# Altium PCB ACDC_Flyback.PcbDoc
Units mm, origin at the board's own origin, x right, y up, seen from the top; angles counter-clockwise.
Board outline 96.5 x 38.4 mm, 2 copper layers (Top Layer, Bottom Layer); 39 components, 20 nets, 86 pads, 0 vias.
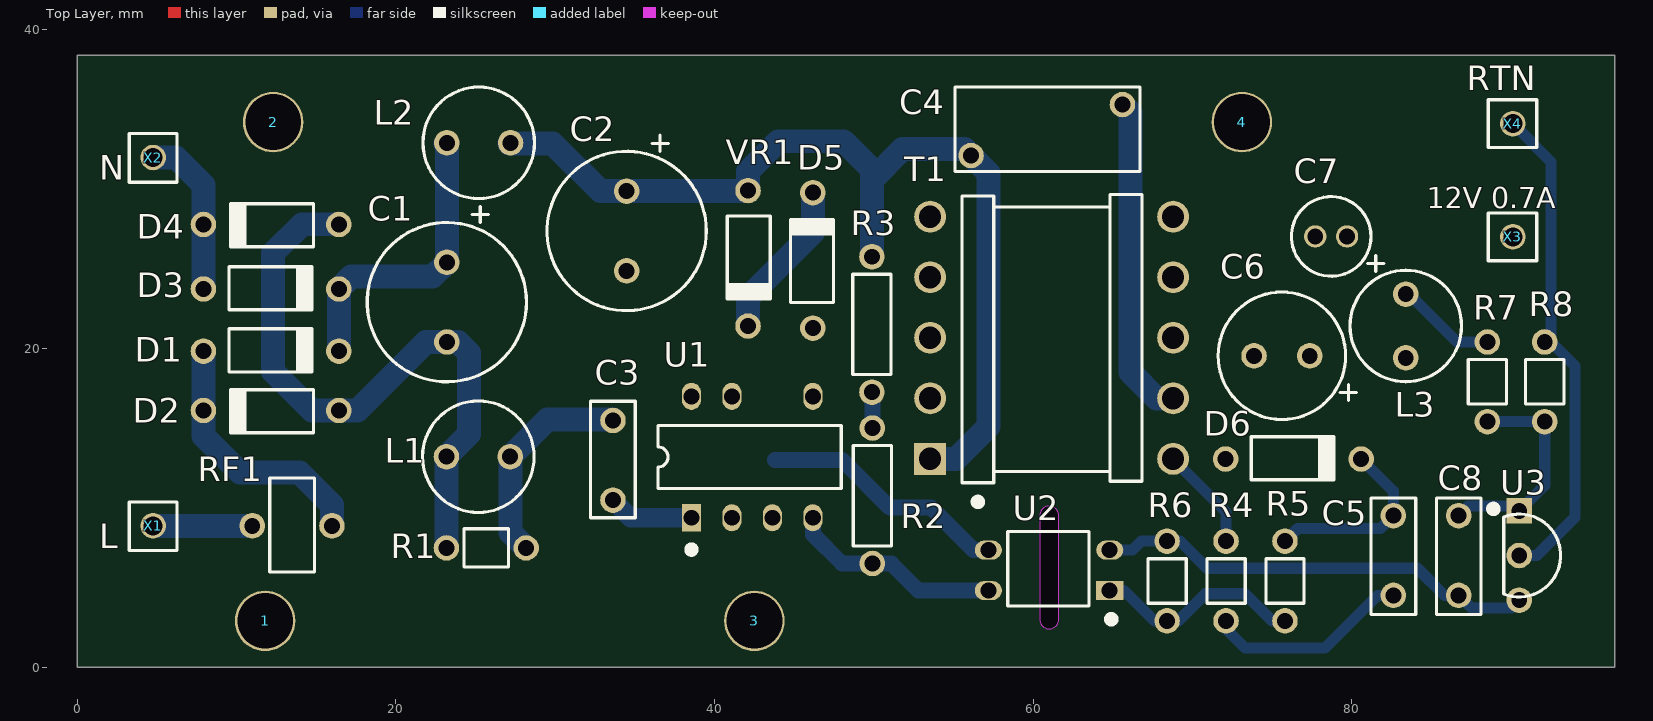
[diagram p0: Top Layer view]
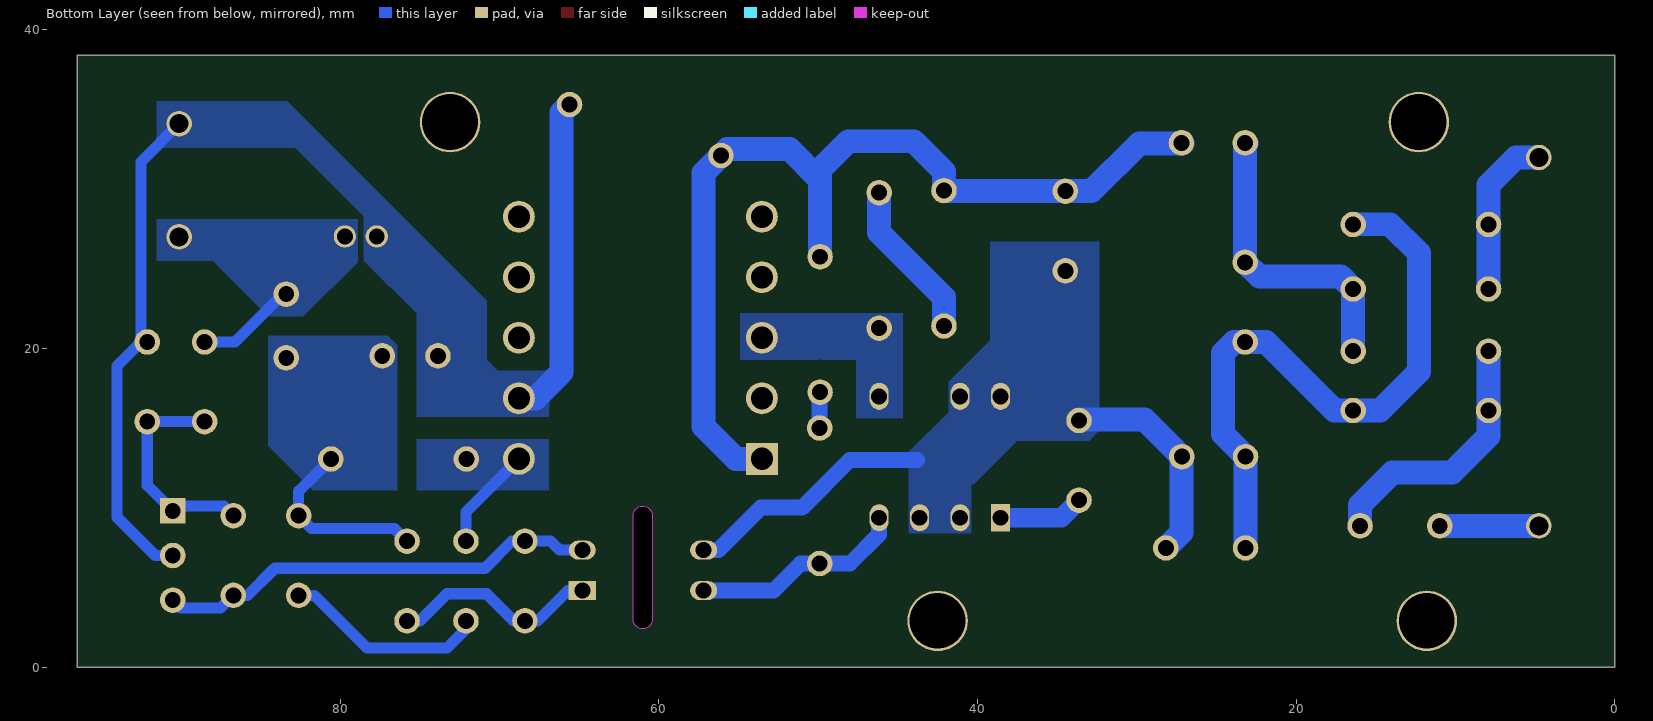
[diagram p1: Bottom Layer view, seen from below]

## Layer stack, top to bottom
Top Solder: solder mask 0.0102, Solder Resist, Dk 3.5
Top Layer: signal copper 0.0356
Dielectric 1: dielectric 0.32, FR-4, Dk 4.8
Bottom Layer: signal copper 0.0356
Bottom Solder: solder mask 0.0102, Solder Resist, Dk 3.5

## Board outline
0,0 0,38.4 96.5,38.4 96.5,0
cut-out: 60.4,3 ccw(c61,3) 61.6,3 61.6,9.5 ccw(c61,9.5) 60.4,9.5

## Design rules (kind name [scope] priority, off if disabled: settings)
Clearance Clearance_LV [WithinRoom('LV')] p1: gap=0.25 ignorepadtopadclearanceinfootprint=FALSE
Clearance Clearance_HV [WithinRoom('HV')] p2: gap=1.25 ignorepadtopadclearanceinfootprint=FALSE
Clearance [All] p3: gap=0.254 ignorepadtopadclearanceinfootprint=FALSE except(0: Arc-Hole Track-Hole SMDPad-Hole THPad-Hole Via-Hole Fill-Hole Poly-Hole Region-Hole Text-Hole)
PolygonConnect PolygonConnect_HV [All] p1: thpad.connectstyle=Direct thpad.reliefconductorwidth=0.254 thpad.reliefentries=4 thpad.polygonreliefangle="90 Angle" thpad.airgapwidth=0.254 smdpad.connectstyle=Relief smdpad.reliefconductorwidth=0.254 smdpad.reliefentries=4 smdpad.polygonreliefangle="90 Angle" smdpad.airgapwidth=0.254 via.connectstyle=Relief via.reliefconductorwidth=0.254 via.reliefentries=4 via.polygonreliefangle="90 Angle" via.airgapwidth=0.254
PolygonConnect [All] p2: connectstyle=Relief reliefconductorwidth=0.254 reliefentries=4 polygonreliefangle="90 Angle" airgapwidth=0.254
RoomDefinition LV [InComponentClass('New Class')] p1: confinementstyle=ConfineIn formatcopy=TRUE lockcomponents=FALSE outline 65.7,38.5 96.5,38.5 96.5,0 65.7,0
RoomDefinition HV [InComponentClass('Components Class 1')] p2: confinementstyle=ConfineIn formatcopy=TRUE lockcomponents=FALSE outline 0.068,38.454 60.012,38.454 60.012,0 0.068,0
RoutingVias [All] p1: holewidth=0.711 width=1.27 viastyle="Through Hole" minholewidth=0.711 minwidth=1.27 maxholewidth=0.711 maxwidth=1.27
SolderMaskExpansion [All] p1: expansion=0.102
Width Width_LV [WithinRoom('LV')] p1: maxlimit=1.5 minlimit=0.3 preferedwidth=0.5
Width Width_HV [WithinRoom('HV')] p2: maxlimit=1.5 minlimit=1 preferedwidth=1.2
Width [All] p3: maxlimit=1.5 minlimit=0.3 preferedwidth=0.3
30 further rules are at their usual default settings.

## Classes and differential pairs
component class "New Class": C5 C6 C7 C8 D6 L3 R4 R5 R6 R7 R8 U3 X3 X4
component class "Components Class 1": C1 C2 C3 D1 D2 D3 D4 D5 L1 L2 R1 R2 R3 RF1 U1 VR1 X1 X2

## Components (designator, comment, footprint, x,y, rotation, side; value= is the part's Value field where it differs from the comment)
1 "MNT HOLE 3.5mm" "MNT HOLE 3.5MM" 11.8,2.9 r90 top
2 "MNT HOLE 3.5mm" "MNT HOLE 3.5MM" 12.3,34.2 r90 top
3 "MNT HOLE 3.5mm" "MNT HOLE 3.5MM" 42.5,2.9 r90 top
4 "MNT HOLE 3.5mm" "MNT HOLE 3.5MM" 73.1,34.2 r90 top
C1 "10uF 400V" "CAP 10X20" 23.2,20.4 r90 top
C2 "10uF 400V" "CAP 10X20" 34.485,24.865 r90 top
C3 "0.1uF" "CAP CER 5MM" 33.625,15.475 r270 top
C4 "2n2" "CAP X1/Y1 9.5MM" 56.1,32.1 r0 top
C5 "27pF" "CAP CER 5MM" 82.6,4.5 r90 top
C6 "330uF 25V" "CAP 8X16" 73.855,19.531 r0 top
C7 "100uF 16V" "CAP 5X11" 77.697,27.024 r0 top
C8 "0.1uF" "CAP CER 5MM" 86.7,4.5 r90 top
D1 "1N4006" "DIODE H 8.5MM" 7.925,19.825 r0 top
D2 "1N4006" "DIODE H 8.5MM" 16.425,16.1 r180 top
D3 "1N4006" "DIODE H 8.5MM" 7.925,23.725 r0 top
D4 "1N4006" "DIODE H 8.5MM" 16.425,27.775 r180 top
D5 "1N4937" "DIODE H 8.5MM" 46.169,21.27 r90 top
D6 "1N4935" "DIODE H 8.5MM" 72.077,13.054 r0 top
L1 "1MH" "IND 4MM BLUE" 23.175,13.2 r0 top
L2 "1MH" "IND 4MM BLUE" 23.2,32.9 r0 top
L3 "3u3" "IND 4MM BLACK" 83.38,19.404 r90 top
R1 "4k7" "RES V 0.25W 5MM" 23.175,7.475 r0 top
R2 "1M" "RES H 0.25W 8.5MM" 49.9,6.5 r90 top
R3 "1M" "RES H 0.25W 8.5MM" 49.875,17.25 r90 top
R4 "360R" "RES V 0.25W 5MM" 72.1,7.9 r270 top
R5 "210R" "RES V 0.25W 5MM" 75.8,7.9 r270 top
R6 "1k" "RES V 0.25W 5MM" 68.4,7.9 r270 top
R7 "43k2" "RES V 0.25W 5MM" 88.5,15.4 r90 top
R8 "11k3" "RES V 0.25W 5MM" 92.1,20.4 r270 top
RF1 "10R" "RES V 2W 5MM" 10.99,8.863 r0 top
T1 "PH0262NL" PH0262NL 53.525,13.064 r90 top
U1 "TNY268PN" DIP8 38.549,9.371 r90 top
U2 "LTV-817" LTV-8X7 64.8,4.8 r180 top
U3 "TL431" "TO-92 (TO-226)" 90.5,9.8 r0 top
VR1 "P6KE2" "DIODE H 8.5MM" 42.1,29.9 r270 top
X1 "L" "POWER TERMINAL" 4.767,8.863 r0 top
X2 "N" "POWER TERMINAL" 4.767,31.977 r0 top
X3 "12V 0.7A" "POWER TERMINAL" 90.1,27 r270 top
X4 "RTN" "POWER TERMINAL" 90.1,34.1 r270 top

## Footprints (in the part's own frame and the unit in brackets; to place one, negate y for a bottom-side part, rotate by r counter-clockwise, add the part's x,y. Pads: shape width x height; smd on the part's side, far side on the other; paste and mask are expansions set on the pad)
"CAP 5X11" [mm]
  round 1.4 hole 1: 1(0,0) 2(2,0)
  silkscreen extent -1.5,-2.5 4.31,2.5, body extent -1.55,-2.5 3.5,2.5, height 11
"CAP 8X16" [mm]
  round 1.6 hole 1: 1(0,0) 2(3.5,0)
  silkscreen extent -2.25,-4 6.43,4, body extent -2.3,-4 5.75,4, height 16
"CAP 10X20" [mm]
  round 1.6 hole 1: 1(0,0) 2(5,0)
  silkscreen extent -2.5,-5 8.51,5, body extent -2.6,-5 7.5,5, height 20
"CAP CER 5MM" [mm]
  round 1.6 hole 1: 1(0,0) 2(5,0)
  silkscreen extent -1.2,-1.4 6.1,1.4, body extent -0.25,-1.2 5.25,1.2, height 6.1
"CAP X1/Y1 9.5MM" [mm]
  round 1.6 hole 1: 1(0,0) 2(9.5,3.2)
  silkscreen extent -1,-1 10.6,4.3, body extent -0.7,-0.4 10.3,3.6, height 12.95
"DIODE H 8.5MM" [mm]
  round 1.6 hole 1: 1(0,0) 2(8.5,0)
  silkscreen extent 1.6,-1.3 6.8,1.4, body extent -0.43,-1.3 8.93,1.39, height 2.7
DIP8 [mm]
  rect 1.7x1.2 hole 1: 1(0,0)
  oval 1.7x1.2 hole 1: 2(0,-2.54) 3(0,-5.08) 4(0,-7.62) 5(7.62,-7.62) 7(7.62,-2.54) 8(7.62,0)
  silkscreen extent -2.2,-9.4 5.78,2.1, body extent -1.17,-8.91 8.82,1.27, height 4.7
"IND 4MM BLACK" [mm]
  round 1.6 hole 1: 1(0,0) 2(4,0)
  silkscreen extent -1.5,-3.5 5.5,3.5, body extent -1.5,-3.5 5.5,3.5, height 6
"IND 4MM BLUE" [mm]
  round 1.6 hole 1: 1(0,0) 2(4,0)
  silkscreen extent -1.5,-3.5 5.5,3.5, body extent -1.5,-3.5 5.5,3.5, height 6
LTV-8X7 [mm]
  rect 1.7x1.2 hole 1: 1(0,0)
  oval 1.7x1.2 hole 1: 2(0,-2.54) 3(7.62,-2.54) 4(7.62,0)
  silkscreen extent -0.3,-3.71 6.4,2, body extent -0.1,-3.7 7.72,1.13, height 3.68
"MNT HOLE 3.5MM" [mm]
  round 3.8 hole 3.5: ""(0,0)
PH0262NL [mm]
  rect 2x2 hole 1.4: 1(0,0)
  round 2 hole 1.4: 2(3.8,0) 3(7.6,0) 4(11.4,0) 5(15.2,0) 6(15.2,-15.25) 7(11.4,-15.25) 8(7.6,-15.25) 9(3.8,-15.25) 10(0,-15.25)
  silkscreen extent -2.9,-13.3 16.6,-2, body extent -1.52,-17.3 16.52,1.72, height 14
"POWER TERMINAL" [mm]
  round 1.6 hole 1.2: 1(0,0)
  silkscreen extent -1.5,-1.55 1.5,1.5
"RES H 0.25W 8.5MM" [mm]
  round 1.6 hole 1: 1(0,0) 2(8.5,0)
  silkscreen extent 1.1,-1.2 7.4,1.2, body extent -0.27,-1.15 8.77,1.24, height 2.55
"RES V 0.25W 5MM" [mm]
  round 1.6 hole 1: 1(0,0) 2(5,0)
  silkscreen extent 1.1,-1.2 3.9,1.2, body extent -1.35,-1.35 5.22,1.34, height 8.14
"RES V 2W 5MM" [mm]
  round 1.6 hole 1: 1(0,0) 2(5,0)
  silkscreen extent 1.1,-2.9 3.9,3, body extent -2.95,-2.95 5.32,3.05, height 13.62
"TO-92 (TO-226)" [mm]
  rect 1.6x1.6 hole 1: 1(0,0)
  round 1.6 hole 1: 2(0,-2.8) 3(0,-5.6)
  silkscreen extent -1.82,-5.4 2.6,0.32, body extent -0.98,-5.85 2.63,0.2, height 9.3

## Part data
C1 C2: library part EKXG401ETD100MJ20S, "CAP ALUM 10uF 400V 10x20", Capacitance=10uF, Case/Package=Radial, Manufacturer="United Chemi-Con", Max Operating Temperature=105°C, Min Operating Temperature=-40°C, Package Quantity=800, Ripple Current=140mA, Supplier Part Number 1=565-4257-1-ND, Tolerance=20%, Voltage Rating=400V, Category=Capasitors, ComponentLink1Description=http://www.chemi-con.co.jp/cgi-bin/CAT_DB/SEARCH/cat_db_al.cgi?e=e&j=p&pdfname=kxg&src-supplier=Digi-Key, ComponentLink1URL=http://www.chemi-con.co.jp/cgi-bin/CAT_DB/SEARCH/cat_db_al.cgi?e=e&j=p&pdfname=kxg&src-supplier=Digi-Key, ComponentLink2Description=http://www.onlinecomponents.com/datasheet/ekxg401etd100mj20s.aspx?p=12708479&src-supplier=Onlinecomponents.com, ComponentLink2URL=http://www.onlinecomponents.com/datasheet/ekxg401etd100mj20s.aspx?p=12708479&src-supplier=Onlinecomponents.com, ComponentLink3Description=http://www.mouser.com/ds/2/420/-794782.pdf?src-supplier=Mouser, ComponentLink3URL=http://www.mouser.com/ds/2/420/-794782.pdf?src-supplier=Mouser, Height - Seated (Max)=0.846inch, Lead Pitch=5mm, Length=20mm, Life (Hours)=8000Hour, Manufacturer Part Number=EKXG401ETD100MJ20S, Mount="Through Hole", Packaging="Tape and Reel", Polarity=Polar, Stock 1=3749, Supplier 1=Digi-Key, Termination=Radial
C3 C8: library part K104K15X7RF5TL2, "CAP CER 0.1UF 50V X7R RADIAL", Capacitance=100nF, Case/Package=Dipped, Dielectric=X7R, Dielectric Material=Ceramic, Manufacturer="Vishay BCcomponents", Max Operating Temperature=125°C, Min Operating Temperature=-55°C, Package Quantity=4000, Supplier Part Number 1=BC1084CT-ND, Tolerance=10%, Voltage=50V, Category=Capacitors, ComponentLink1Description=http://www.vishay.com/docs/45171/kseries.pdf?src-supplier=Digi-Key, ComponentLink1URL=http://www.vishay.com/docs/45171/kseries.pdf?src-supplier=Digi-Key, ComponentLink2Description=http://components.arrow.com/part/dataview/4566668S9851583N4052?src-supplier=Arrow, ComponentLink2URL=http://components.arrow.com/part/dataview/4566668S9851583N4052?src-supplier=Arrow, ComponentLink3Description=http://www.mouser.com/ds/2/427/kvseries-1097555.pdf?src-supplier=Mouser, ComponentLink3URL=http://www.mouser.com/ds/2/427/kvseries-1097555.pdf?src-supplier=Mouser, ComponentLink4Description=https://www.alliedelec.com/m/d/0a55132c315b03541979b2302407a53b.pdf?src-supplier=Allied+Electronics, ComponentLink4URL=https://www.alliedelec.com/m/d/0a55132c315b03541979b2302407a53b.pdf?src-supplier=Allied+Electronics, ComponentLink5Description=https://www.verical.com/server-webapp/html/getDatasheet?partID=35651&src-supplier=Verical, ComponentLink5URL=https://www.verical.com/server-webapp/html/getDatasheet?partID=35651&src-supplier=Verical, ComponentLink6Description=http://www.farnell.com/datasheets/2608733.pdf?src-supplier=Farnell, ComponentLink6URL=http://www.farnell.com/datasheets/2608733.pdf?src-supplier=Farnell, ComponentLink7Description=http://www.farnell.com/datasheets/2045807.pdf?src-supplier=Element14, ComponentLink7URL=http://www.farnell.com/datasheets/2045807.pdf?src-supplier=Element14, Contact Plating=Tin, Depth=2.6mm, Diameter=500um, Height=4mm, Height - Seated (Max)=0.22inch, Lead/Base Style=Straight, Lead Diameter=0.5mm, Lead Free="Lead Free", Lead Length=30mm, Lead Pitch=2.5mm, Length=4mm, Manufacturer Part Number=K104K15X7RF5TL2, Mount="Through Hole,PCB", Number of Pins=2, Packaging="Tape and Reel", Radiation Hardening=No, REACH SVHC=Unknown, Stock 1=40474, Supplier 1=Digi-Key, Termination=Radial, Thickness=2.6mm, Voltage Rating=50V, Voltage Rating (DC)=50V, Weight=0.005291oz, Width=0.098inch
C4: library part 440LD22-R, "CAP CER 2u2 X1/Y1 400VAC/500VAC Y5U 20% (10.9 X 5.7mm) Radial 9.5mm Bulk", Capacitance=2.2nF, Case/Package=Radial, Dielectric=Y5U, Manufacturer=Vishay, Max Operating Temperature=125°C, Min Operating Temperature=-30°C, Package Quantity=250, Ratings=X1,Y1, Supplier Part Number 1=BC3229-ND, Tolerance=20%, Voltage=500V, Category=Capacitors, ComponentLink1Description=https://www.alliedelec.com/m/d/8418b65e1fb6842b96172f5a3b1dd544.pdf?src-supplier=Allied+Electronics, ComponentLink1URL=https://www.alliedelec.com/m/d/8418b65e1fb6842b96172f5a3b1dd544.pdf?src-supplier=Allied+Electronics, ComponentLink2Description=https://www.verical.com/server-webapp/html/getDatasheet?partID=310202&src-supplier=Verical, ComponentLink2URL=https://www.verical.com/server-webapp/html/getDatasheet?partID=310202&src-supplier=Verical, ComponentLink3Description=http://www.vishay.com/docs/23102/440lseries.pdf?src-supplier=Digi-Key, ComponentLink3URL=http://www.vishay.com/docs/23102/440lseries.pdf?src-supplier=Digi-Key, ComponentLink4Description=http://www.mouser.com/ds/2/427/440lseries-239711.pdf?src-supplier=Mouser, ComponentLink4URL=http://www.mouser.com/ds/2/427/440lseries-239711.pdf?src-supplier=Mouser, Composition=Ceramic, Contact Plating=Tin, Depth=5.7mm, Diameter=10.9mm, Dissipation Factor=2%, Height=5.7mm, Height - Seated (Max)=0.555inch, Lead/Base Style=Straight, Lead Diameter=0.81mm, Lead Free="Lead Free", Lead Pitch=9.5mm, Manufacturer Part Number=440LD22-R, Mount="Through Hole,PCB", Packaging=Bulk, Radiation Hardening=No, Stock 1=0, Supplier 1=Digi-Key, Termination=Radial, Voltage Rating (AC)=500V
C5: library part RCE5C2A270J0M1H03A, "CAP CER 27pF 100V C0G/NP0 RADIAL", Case/Package=Radial, Dielectric=C0G, Manufacturer=Murata, Max Operating Temperature=125°C, Min Operating Temperature=-55°C, Package Quantity=2000, Ratings=AEC-Q200, Supplier Part Number 1=490-7451-1-ND, Tolerance=5%, Voltage Rating=100V, Capacitance=27pF, Category=Capasitors, ComponentLink1Description=http://search.murata.co.jp/Ceramy/image/img/A01X/CNRPEE.pdf?src-supplier=Digi-Key, ComponentLink1URL=http://search.murata.co.jp/Ceramy/image/img/A01X/CNRPEE.pdf?src-supplier=Digi-Key, Composition=Ceramic, Height=3.5mm, Height - Seated (Max)=0.138inch, Lead/Base Style="Formed Leads", Lead Diameter=0.5mm, Lead Pitch=0.197inch, Length=0.142inch, Manufacturer Part Number=RCE5C2A270J0M1H03A, Mount="Through Hole", Packaging="Tape and Reel", Stock 1=7163, Supplier 1=Digi-Key, Termination=Radial, Voltage Rating (DC)=100V, Width=0.098inch
C6: library part ESY337M025AG8AA, "CAP ALUM 330uF 25V 20% 105C Radial 8x16 Aluminum Electrolytic Capacitors", Capacitance=330uF, Case/Package=Radial, Dielectric Material=Aluminium, ESR (Equivalent Series Resistance)=56mR, Leakage Current=82uA, Manufacturer=KEMET, Max Operating Temperature=105°C, Min Operating Temperature=-40°C, Package Quantity=5000, Ripple Current=700mA, Supplier Part Number 1=399-6125-ND, Tolerance=20%, Voltage=25V, Category=Capacitors, ComponentLink1Description=http://capacitoredge.kemet.com/capedge2/DataSheet?pn=ESY337M025AG8AA&src-supplier=Avnet, ComponentLink1URL=http://capacitoredge.kemet.com/capedge2/DataSheet?pn=ESY337M025AG8AA&src-supplier=Avnet, ComponentLink2Description=http://uk.rs-online.com/webdocs/1443/0900766b81443d12.pdf?src-supplier=RSComponents, ComponentLink2URL=http://uk.rs-online.com/webdocs/1443/0900766b81443d12.pdf?src-supplier=RSComponents, ComponentLink3Description=https://search.kemet.com/component-edge/download/specsheet/ESY337M025AG8AA.pdf?src-supplier=Digi-Key, ComponentLink3URL=https://search.kemet.com/component-edge/download/specsheet/ESY337M025AG8AA.pdf?src-supplier=Digi-Key, ComponentLink4Description=http://capacitoredge.kemet.com/capedge2/DataSheet?pn=ESY337M025AG8AA&src-supplier=Avnet+Europe, ComponentLink4URL=http://capacitoredge.kemet.com/capedge2/DataSheet?pn=ESY337M025AG8AA&src-supplier=Avnet+Europe, ComponentLink5Description=https://www.alliedelec.com/m/d/e4a14f479f712247b3f3335e27a86e2b.pdf?src-supplier=Allied+Electronics, ComponentLink5URL=https://www.alliedelec.com/m/d/e4a14f479f712247b3f3335e27a86e2b.pdf?src-supplier=Allied+Electronics, ComponentLink6Description=http://www.mouser.com/ds/2/212/KEM_A4007_ESY-1103537.pdf?src-supplier=Mouser, ComponentLink6URL=http://www.mouser.com/ds/2/212/KEM_A4007_ESY-1103537.pdf?src-supplier=Mouser, Diameter=8mm, Dissipation Factor=0.14%, Height=16mm, Height - Seated (Max)=0.709inch, Impedance=56mR, Lead/Base Style=Straight, Lead Diameter=0.6mm, Lead Length=20mm, Lead Pitch=3.5mm, Length=16mm, Life (Hours)=3000Hour, Manufacturer Part Number=ESY337M025AG8AA, Mount="Through Hole,PCB", Packaging=Bulk, Radiation Hardening=No, Stock 1=2532, Supplier 1=Digi-Key, Termination=Radial, Voltage Rating=25V, Voltage Rating (DC)=25V
C7: library part ESL107M016AC3AA, "CAP ALUM 100UF 16V 20% THRU HOLE", Capacitance=100uF, Case/Package=Radial, ESR (Equivalent Series Resistance)=230mR, Manufacturer=KEMET, Max Operating Temperature=105°C, Min Operating Temperature=-40°C, Supplier Part Number 1=399-15740-ND, Tolerance=20%, Voltage Rating=16V, Category=Capacitors, ComponentLink1Description=https://api.kemet.com/component-edge/download/datasheet/ESL107M016AC3AA.pdf?src-supplier=Digi-Key, ComponentLink1URL=https://api.kemet.com/component-edge/download/datasheet/ESL107M016AC3AA.pdf?src-supplier=Digi-Key, Life (Hours)=8000Hour, Manufacturer Part Number=ESL107M016AC3AA, Mount="Through Hole", Packaging=Bulk, Polarity=Polar, Stock 1=28659, Supplier 1=Digi-Key
D1 D2 D3 D4: library part 1N4006E354, "DIODE 1N4006 GEN PURP 800V 1A DO204AL", Capacitance=15pF, Current Rating=1A, Forward Voltage=1.1V, Manufacturer="Vishay Intertechnology", Max Operating Temperature=150°C, Min Operating Temperature=-50°C, Peak Non-Repetitive Surge Current=45A, Supplier Part Number 1=1N4006-E3/54GITR-ND, Voltage Rating (DC)=800V, Category=Diodes, ComponentLink1Description=https://www.verical.com/server-webapp/html/getDatasheet?partID=770984&src-supplier=Verical, ComponentLink1URL=https://www.verical.com/server-webapp/html/getDatasheet?partID=770984&src-supplier=Verical, Element Configuration=Single, Lead Free="Lead Free", Manufacturer Part Number=1N4006E354, Mount="Through Hole", Number of Pins=2, Output Current=1A, Packaging="Tape and Reel", Polarity=Standard, Radiation Hardening=No, Stock 1=0, Supplier 1=Digi-Key
D5: library part 1N4937GP-E3/73, "DIODE 1N4937 Rectifiers 1.0 Amp 600 Volt Glass Passivated", Average Rectified Current=1A, Manufacturer="Vishay Semiconductors", Max Operating Temperature=175°C, Max Repetitive Reverse Voltage (Vrrm)=600V, Max Surge Current=30A, Min Operating Temperature=-65°C, Package Quantity=3000, Peak Reverse Current=5uA, Supplier Part Number 1=1N4937GP-E3/73GICT-ND, Category=Diodes, ComponentLink1Description=http://www.vishay.com/docs/88509/1n4933gp.pdf?src-supplier=Avnet+Europe, ComponentLink1URL=http://www.vishay.com/docs/88509/1n4933gp.pdf?src-supplier=Avnet+Europe, ComponentLink2Description=http://www.vishay.com/docs/88509/1n4933gp.pdf?src-supplier=Digi-Key, ComponentLink2URL=http://www.vishay.com/docs/88509/1n4933gp.pdf?src-supplier=Digi-Key, Contact Plating=Tin,Matte, Element Configuration=Single, Manufacturer Part Number=1N4937GP-E3/73, Max Reverse Voltage (DC)=600V, Mount="Through Hole", Number of Pins=2, Packaging="Tape and Reel", Peak Non-Repetitive Surge Current=30A, Radiation Hardening=No, Recovery Time=200ns, Reverse Recovery Time=200ns, Reverse Voltage=600V, Stock 1=12000, Supplier 1=Digi-Key
D6: library part 1N4935-E3/54, "DIODE 1N4935 Rectifiers 1.0 Amp 200 Volt", Average Rectified Current=1A, Forward Voltage=1.2V, Manufacturer="Vishay Semiconductors", Max Forward Surge Current (Ifsm)=30A, Max Operating Temperature=150°C, Max Repetitive Reverse Voltage (Vrrm)=200V, Min Operating Temperature=-50°C, Package Quantity=1, Peak Reverse Current=5uA, Supplier Part Number 1=1N4935-E3/54GICT-ND, Category=Diodes, ComponentLink1Description=http://www.vishay.com/docs/88508/1n4933.pdf?src-supplier=Digi-Key, ComponentLink1URL=http://www.vishay.com/docs/88508/1n4933.pdf?src-supplier=Digi-Key, ComponentLink2Description=https://www.verical.com/server-webapp/html/getDatasheet?partID=249870&src-supplier=Verical, ComponentLink2URL=https://www.verical.com/server-webapp/html/getDatasheet?partID=249870&src-supplier=Verical, ComponentLink3Description=http://www.vishay.com/docs/88508/1n4933.pdf?src-supplier=Future+Electronics, ComponentLink3URL=http://www.vishay.com/docs/88508/1n4933.pdf?src-supplier=Future+Electronics, ComponentLink4Description=https://www.alliedelec.com/m/d/1dbe1470819963bfa21f0af49fac4c8c.pdf?src-supplier=Allied+Electronics, ComponentLink4URL=https://www.alliedelec.com/m/d/1dbe1470819963bfa21f0af49fac4c8c.pdf?src-supplier=Allied+Electronics, ComponentLink5Description=http://www.vishay.com/docs/88508/1n4933.pdf?src-supplier=Avnet, ComponentLink5URL=http://www.vishay.com/docs/88508/1n4933.pdf?src-supplier=Avnet, ComponentLink6Description=http://www.vishay.com/docs/88508/1n4933.pdf?src-supplier=Avnet+Europe, ComponentLink6URL=http://www.vishay.com/docs/88508/1n4933.pdf?src-supplier=Avnet+Europe, Current=1A, Diameter=2.7mm, Element Configuration=Single, Forward Current=1A, Lead Free="Lead Free", Length=0.204inch, Manufacturer Part Number=1N4935-E3/54, Max Reverse Voltage (DC)=200V, Max Surge Current=30A, Mount="Through Hole", Number of Pins=2, Packaging="Tape and Reel", Peak Non-Repetitive Surge Current=30A, Radiation Hardening=No, REACH SVHC=Unknown, Recovery Time=200ns, Reverse Recovery Time=200ns, Reverse Voltage=200V, Stock 1=13746, Supplier 1=Digi-Key, Voltage=200V
L1 L2: library part SBC2-102-181, "IND 1MH 180MA 4 OHM TH", Case/Package=Radial, Current Rating=180mA, DC Resistance (DCR)=4R, Inductance=1mH, Manufacturer=KEMET, Saturation Current=210mA, Supplier Part Number 1=399-18899-ND, Test Frequency=10kHz, Tolerance=10%, Category=Inductors, ComponentLink1Description=http://www.kemet.com/Lists/ProductCatalog/Attachments/606/KEM_L9007_SBC.pdf?src-supplier=Digi-Key, ComponentLink1URL=http://www.kemet.com/Lists/ProductCatalog/Attachments/606/KEM_L9007_SBC.pdf?src-supplier=Digi-Key, Composition=Wirewound, Core Material=Ferrite, Height - Seated (Max)=0.413inch, Manufacturer Part Number=SBC2-102-181, Mount="Through Hole", Packaging=Bulk, Shielding=Unshielded, Stock 1=0, Supplier 1=Digi-Key
L3: library part RL622-3R3K-RC, "IND 3u3 5.5A 25 MOHM TH", Case/Package=Radial, Current Rating=5.5A, DC Resistance (DCR)=25mR, Inductance=3.3uH, Inductance Tolerance=10%, Manufacturer=Bourns, Max Operating Temperature=105°C, Min Operating Temperature=-55°C, Package Quantity=100, Self Resonant Frequency=79MHz, Supplier Part Number 1=M9978-ND, Test Frequency=7.96MHz, Category=Inductors, ComponentLink1Description=http://www.mouser.com/ds/2/54/RL622_series-38677.pdf?src-supplier=Mouser, ComponentLink1URL=http://www.mouser.com/ds/2/54/RL622_series-38677.pdf?src-supplier=Mouser, ComponentLink2Description=http://www.bourns.com/data/global/pdfs/rl622_series.pdf?src-supplier=Avnet, ComponentLink2URL=http://www.bourns.com/data/global/pdfs/rl622_series.pdf?src-supplier=Avnet, ComponentLink3Description=http://www.farnell.com/datasheets/1695387.pdf?src-supplier=Element14, ComponentLink3URL=http://www.farnell.com/datasheets/1695387.pdf?src-supplier=Element14, ComponentLink4Description=http://www.bourns.com/data/global/pdfs/rl622_series.pdf?src-supplier=Avnet+Europe, ComponentLink4URL=http://www.bourns.com/data/global/pdfs/rl622_series.pdf?src-supplier=Avnet+Europe, ComponentLink5Description=http://uk.rs-online.com/webdocs/0fa5/0900766b80fa594f.pdf?src-supplier=RSComponents, ComponentLink5URL=http://uk.rs-online.com/webdocs/0fa5/0900766b80fa594f.pdf?src-supplier=RSComponents, ComponentLink6Description=https://www.bourns.com/docs/Product-Datasheets/rl622_series.pdf?src-supplier=Digi-Key, ComponentLink6URL=https://www.bourns.com/docs/Product-Datasheets/rl622_series.pdf?src-supplier=Digi-Key, Composition=Wirewound, Core Material=Ferrite, DC Current=5.5A, Diameter=8.5mm, Height=11mm, Height - Seated (Max)=0.433inch, Lead/Base Style=Radial, Lead Diameter=0.62mm, Lead Free="Lead Free", Lead Length=5mm, Lead Pitch=5mm, Manufacturer Part Number=RL622-3R3K-RC, Max DC Current=5.5A, Military Standard=Not, Mount="Through Hole,Radial", Number of Pins=2, Orientation=Vertical, Packaging=Bulk, Q Factor=20, Radiation Hardening=No, REACH SVHC="No SVHC", RMS Current (Irms)=5.5A, Shielding=Unshielded, Stock 1=14097, Supplier 1=Digi-Key, Termination=Radial, Tolerance=10%, Width=8.5mm
R1: library part CFR-25JB-52-4K7, "RES T/H 4k7 OHM 1/4W 5% AXIAL", Case/Package=Axial, Manufacturer=Yageo, Max Operating Temperature=155°C, Max Power Dissipation=250mW, Min Operating Temperature=-55°C, Package Quantity=200, Resistance=4.7kR, Supplier Part Number 1=4.7KQBK-ND, Temperature Coefficient=500ppm/°C, Tolerance=5%, Category=Resistors, ComponentLink1Description=http://www.yageo.com/NewPortal/yageodocoutput?fileName=/pdf/throughhole/Yageo_LR_CFR_2013.pdf&src-supplier=Digi-Key, ComponentLink1URL=http://www.yageo.com/NewPortal/yageodocoutput?fileName=/pdf/throughhole/Yageo_LR_CFR_2013.pdf&src-supplier=Digi-Key, ComponentLink2Description=http://www.yageo.com/documents/recent/General%20Type_CFR.pdf?src-supplier=Future+Electronics, ComponentLink2URL=http://www.yageo.com/documents/recent/General%20Type_CFR.pdf?src-supplier=Future+Electronics, Composition="Carbon Film", Lead Free="Lead Free", Length=0.248inch, Manufacturer Part Number=CFR-25JB-52-4K7, Number of Terminations=2, Packaging=Bulk, Power Rating=250mW, Stock 1=133689, Supplier 1=Digi-Key
R2 R3: library part CFR-25JB-52-1M, "RES T/H 1M OHM 1/4W 5% AXIAL", Case/Package=Axial, Manufacturer=Yageo, Max Operating Temperature=155°C, Max Power Dissipation=250mW, Min Operating Temperature=-55°C, Package Quantity=200, Resistance=1MR, Supplier Part Number 1=1.0MQBK-ND, Temperature Coefficient=-1500ppm/°C, Tolerance=5%, Category=Resistors, ComponentLink1Description=http://www.yageo.com/documents/recent/General%20Type_CFR.pdf?src-supplier=Future+Electronics, ComponentLink1URL=http://www.yageo.com/documents/recent/General%20Type_CFR.pdf?src-supplier=Future+Electronics, ComponentLink2Description=http://www.yageo.com/NewPortal/yageodocoutput?fileName=/pdf/throughhole/Yageo_LR_CFR_2013.pdf&src-supplier=Digi-Key, ComponentLink2URL=http://www.yageo.com/NewPortal/yageodocoutput?fileName=/pdf/throughhole/Yageo_LR_CFR_2013.pdf&src-supplier=Digi-Key, Composition="Carbon Film", Lead Free="Lead Free", Length=0.248inch, Manufacturer Part Number=CFR-25JB-52-1M, Number of Terminations=2, Packaging=Bulk, Power Rating=250mW, Stock 1=156783, Supplier 1=Digi-Key
R4: library part CFR-25JB-52-360R, "RES T/H 360 OHM 1/4W 5% AXIAL", Case/Package=Axial, Manufacturer=Yageo, Max Operating Temperature=155°C, Max Power Dissipation=250mW, Min Operating Temperature=-55°C, Package Quantity=200, Supplier Part Number 1=360QBK-ND, Temperature Coefficient=500ppm/°C, Tolerance=5%, Category=Resistors, ComponentLink1Description=http://www.yageo.com/NewPortal/yageodocoutput?fileName=/pdf/throughhole/Yageo_LR_CFR_2013.pdf&src-supplier=Digi-Key, ComponentLink1URL=http://www.yageo.com/NewPortal/yageodocoutput?fileName=/pdf/throughhole/Yageo_LR_CFR_2013.pdf&src-supplier=Digi-Key, Composition="Carbon Film", Length=0.248inch, Manufacturer Part Number=CFR-25JB-52-360R, Number of Terminations=2, Packaging=Bulk, Resistance=360R, Stock 1=30687, Supplier 1=Digi-Key
R5: library part MFR-25FBF52-210R, "RES T/H 210 OHM 1/4W 1%", Case/Package=Axial, Manufacturer=Yageo, Max Operating Temperature=155°C, Max Power Dissipation=250mW, Min Operating Temperature=-55°C, Package Quantity=200, Supplier Part Number 1=210XBK-ND, Temperature Coefficient=100ppm/°C, Tolerance=1%, Voltage Rating=250V, Voltage Rating (DC)=200V, Category=Resistors, ComponentLink1Description=http://www.yageo.com/documents/recent/Yageo%20LR_MFR_2013.pdf?src-supplier=Digi-Key, ComponentLink1URL=http://www.yageo.com/documents/recent/Yageo%20LR_MFR_2013.pdf?src-supplier=Digi-Key, Composition="Metal Film", Length=0.248inch, Manufacturer Part Number=MFR-25FBF52-210R, Mount="Through Hole", Number of Terminations=2, Packaging=Bulk, Power Rating=250mW, Resistance=210R, Stock 1=9695, Supplier 1=Digi-Key, Termination=Axial
R6: library part MFR-25FBF52-1K, "RES T/H 1K OHM 1/4W 1%", Case/Package=Axial, Manufacturer=Yageo, Max Operating Temperature=155°C, Max Power Dissipation=250mW, Min Operating Temperature=-55°C, Package Quantity=200, Resistance=1kR, Supplier Part Number 1=1.00KXBK-ND, Temperature Coefficient=100ppm/°C, Tolerance=1%, Voltage Rating=250V, Voltage Rating (DC)=200V, Category=Resistors, ComponentLink1Description=http://www.yageo.com/documents/recent/Yageo%20LR_MFR_2013.pdf?src-supplier=Digi-Key, ComponentLink1URL=http://www.yageo.com/documents/recent/Yageo%20LR_MFR_2013.pdf?src-supplier=Digi-Key, Composition="Metal Film", Lead Diameter=0.6mm, Lead Free="Lead Free", Length=0.248inch, Manufacturer Part Number=MFR-25FBF52-1K, Mount="Through Hole", Number of Terminations=2, Packaging=Bulk, Power Rating=250mW, Stock 1=94485, Supplier 1=Digi-Key, Termination=Axial, Width=6.3mm
R7: library part MFR-25FBF52-43K2, "RES T/H 43k2 OHM 1/4W 1%", Case/Package=Axial, Manufacturer=Yageo, Max Operating Temperature=155°C, Max Power Dissipation=250mW, Min Operating Temperature=-55°C, Package Quantity=200, Resistance=43.2kR, Supplier Part Number 1=43.2KXBK-ND, Temperature Coefficient=100ppm/°C, Tolerance=1%, Voltage Rating=250V, Voltage Rating (DC)=200V, Category=Resistors, ComponentLink1Description=http://www.yageo.com/documents/recent/Yageo%20LR_MFR_2013.pdf?src-supplier=Digi-Key, ComponentLink1URL=http://www.yageo.com/documents/recent/Yageo%20LR_MFR_2013.pdf?src-supplier=Digi-Key, Composition="Metal Film", Lead Diameter=0.6mm, Length=0.248inch, Manufacturer Part Number=MFR-25FBF52-43K2, Mount="Through Hole", Number of Terminations=2, Packaging=Bulk, Power Rating=250mW, Stock 1=5915, Supplier 1=Digi-Key, Termination=Axial, Width=6.3mm
R8: library part MFR-25FBF52-11K3, "RES T/H 11k3 OHM 1/4W 1% Metal Film", Case/Package=Axial, Manufacturer=Yageo, Max Operating Temperature=155°C, Max Power Dissipation=250mW, Min Operating Temperature=-55°C, Package Quantity=200, Resistance=11.3kR, Supplier Part Number 1=11.3KXBK-ND, Temperature Coefficient=100ppm/°C, Tolerance=1%, Voltage Rating=250V, Voltage Rating (DC)=200V, Category=Resistors, ComponentLink1Description=http://www.yageo.com/documents/recent/Yageo%20LR_MFR_2013.pdf?src-supplier=Digi-Key, ComponentLink1URL=http://www.yageo.com/documents/recent/Yageo%20LR_MFR_2013.pdf?src-supplier=Digi-Key, Composition="Metal Film", Length=0.248inch, Manufacturer Part Number=MFR-25FBF52-11K3, Number of Terminations=2, Packaging=Bulk, Power Rating=250mW, Stock 1=4405, Supplier 1=Digi-Key, Termination=Axial
RF1: library part FW20A10R0JA, "RES T/H 10 OHM 2W Wirewound 5% ±200ppm/C Conformal AXL Ammo Pack", Case/Package=Axial, Manufacturer=Bourns, Max Operating Temperature=155°C, Max Power Dissipation=2W, Min Operating Temperature=-55°C, Package Quantity=1, Supplier Part Number 1=FW20A10R0JACT-ND, Temperature Coefficient=200ppm/°C, Threshold Voltage=4.5V, Tolerance=5%, Voltage Rating=240V, Category=Resistors, ComponentLink1Description=http://www.bourns.com/docs/Product-Datasheets/FW.pdf?src-supplier=Digi-Key, ComponentLink1URL=http://www.bourns.com/docs/Product-Datasheets/FW.pdf?src-supplier=Digi-Key, ComponentLink2Description=http://www.mouser.com/ds/2/54/w-777661.pdf?src-supplier=Mouser, ComponentLink2URL=http://www.mouser.com/ds/2/54/w-777661.pdf?src-supplier=Mouser, ComponentLink3Description=http://www.farnell.com/datasheets/1835149.pdf?src-supplier=Element14, ComponentLink3URL=http://www.farnell.com/datasheets/1835149.pdf?src-supplier=Element14, Composition=Wirewound, Diameter=6mm, Lead Diameter=0.65mm, Lead Free="Lead Free", Length=12mm, Manufacturer Part Number=FW20A10R0JA, Military Standard=Not, Number of Terminations=2, Packaging="Tape and Reel", Power Rating=2W, REACH SVHC=Unknown, Resistance=10R, Stock 1=16366, Supplier 1=Digi-Key, Termination=Axial, Voltage Rating (DC)=240V
T1: "Transformer 3000Vrms 95V/265V Prim. 12V/9V Sec. Through Hole", Manufacturer=Pulse, Power Rating=60W, Supplier Part Number 1=PH0262NL-ND, Category=Transformers, ComponentLink1Description=http://productfinder.pulseeng.com/products/datasheets/P724.pdf?src-supplier=Avnet, ComponentLink1URL=http://productfinder.pulseeng.com/products/datasheets/P724.pdf?src-supplier=Avnet, Manufacturer Part Number=PH0262NL, Mount="Through Hole", Stock 1=0, Supplier 1=Digi-Key
U1: "IC TNY268PN OFF LINE SWITCHER, DIP8, 268", Breakdown Voltage=700V, Case/Package=DIP, Manufacturer="Power Integrations", Max Operating Temperature=150°C, Max Output Current=880mA, Max Power Dissipation=23W, Max Supply Voltage (AC)=265V, Min Operating Temperature=-40°C, Min Supply Voltage (AC)=85V, Operating Supply Current=380uA, Output Current=588mA, Output Power=15W, Output Voltage=5.8V, Package Quantity=50, Supplier Part Number 1=596-1055-5-ND, Switching Frequency=132kHz, Category="Integrated Circuits", ComponentLink1Description=http://www.farnell.com/datasheets/1816307.pdf?src-supplier=Element14, ComponentLink1URL=http://www.farnell.com/datasheets/1816307.pdf?src-supplier=Element14, ComponentLink2Description=https://www.power.com/sites/default/files/product-docs/tny263_268.pdf?src-supplier=Digi-Key, ComponentLink2URL=https://www.power.com/sites/default/files/product-docs/tny263_268.pdf?src-supplier=Digi-Key, ComponentLink3Description=https://www.distrelec.biz/Web/Downloads/gn/_e/tfTNY263PN-to-TNY268GN_e.pdf?mime=application%2Fpdf&src-supplier=Distrelec, ComponentLink3URL=https://www.distrelec.biz/Web/Downloads/gn/_e/tfTNY263PN-to-TNY268GN_e.pdf?mime=application%2Fpdf&src-supplier=Distrelec, Height=3.68mm, Lead Free="Lead Free", Length=9.83mm, Manufacturer Part Number=TNY268PN, Max Duty Cycle=68%, Mount="Through Hole", Number of Outputs=1, Number of Pins=7, Output Type=Adjustable, Packaging=Rail/Tube, Radiation Hardening=No, REACH SVHC="No SVHC", Stock 1=13651, Supplier 1=Digi-Key, Topology=Flyback, Weight=0.080001oz, Width=6.6mm
U2: library part LTV-817-A, "OPT DC-IN 1-CH Transistor DC-OUT 4-Pin PDIP", Case/Package=PDIP, Collector Emitter Saturation Voltage=200mV, Collector Emitter Voltage (VCEO)=35V, Current Transfer Ratio=160%, Forward Current=50mA, Forward Voltage=1.4V, Isolation Voltage=5kV, Manufacturer="Vishay Lite-On", Max Collector Current=8mA, Max Operating Temperature=100°C, Min Operating Temperature=-30°C, Power Dissipation=200mW, Reverse Breakdown Voltage=6V, Supplier Part Number 1=160-2037-5-ND, Category=Optoisolators, ComponentLink1Description=https://www.verical.com/server-webapp/html/getDatasheet?partID=119517&src-supplier=Verical, ComponentLink1URL=https://www.verical.com/server-webapp/html/getDatasheet?partID=119517&src-supplier=Verical, ComponentLink2Description=http://www1.futureelectronics.com/doc/LITE-ON/LTV-817-A.pdf?src-supplier=Future+Electronics, ComponentLink2URL=http://www1.futureelectronics.com/doc/LITE-ON/LTV-817-A.pdf?src-supplier=Future+Electronics, Fall Time=18000ns, Manufacturer Part Number=LTV-817-A, Max Output Voltage=35V, Mount="Through Hole", Number of Channels=1, Number of Elements=1, Number of Pins=4, Radiation Hardening=No, Rise Time=18000ns, Stock 1=12008, Supplier 1=Digi-Key
U3: library part TL431ACLPRAG, "IC TL431 VREF SHUNT ADJ TO92-3", Case/Package=TO-92-3, Cathode Current=1mA, Current Rating=500uA, Manufacturer="ON Semiconductor", Max Input Voltage=37V, Max Operating Temperature=70°C, Max Output Current=100mA, Max Output Voltage=36V, Min Operating Temperature=0°C, Package Quantity=1, Supplier Part Number 1=TL431ACLPRAGOSCT-ND, Temperature Coefficient=50ppm/°C, Tolerance=1%, Accuracy=1%, Category="Integrated Circuits", ComponentLink1Description=http://www.onsemi.com/pub/Collateral/TL431-D.PDF?src-supplier=Digi-Key, ComponentLink1URL=http://www.onsemi.com/pub/Collateral/TL431-D.PDF?src-supplier=Digi-Key, ComponentLink2Description=http://www.onsemi.com/pub_link/Collateral/TL431-D.PDF?src-supplier=Avnet, ComponentLink2URL=http://www.onsemi.com/pub_link/Collateral/TL431-D.PDF?src-supplier=Avnet, ComponentLink3Description=http://www.onsemi.com/pub/Collateral/TL431-D.PDF?src-supplier=Future+Electronics, ComponentLink3URL=http://www.onsemi.com/pub/Collateral/TL431-D.PDF?src-supplier=Future+Electronics, ComponentLink4Description=http://www.farnell.com/datasheets/2118317.pdf?src-supplier=Element14, ComponentLink4URL=http://www.farnell.com/datasheets/2118317.pdf?src-supplier=Element14, ComponentLink5Description=http://www.onsemi.com/pub/Collateral/TL431-D.PDF?src-supplier=Avnet+Europe, ComponentLink5URL=http://www.onsemi.com/pub/Collateral/TL431-D.PDF?src-supplier=Avnet+Europe, Halogen Free="Halogen Free", Lead Free="Lead Free", Manufacturer Part Number=TL431ACLPRAG, Mount="Through Hole", Number of Channels=1, Number of Pins=3, Output Current=100mA, Output Voltage=36V, Packaging="Tape and Reel", Radiation Hardening=No, REACH SVHC="No SVHC", Reference Type=Shunt,Adjustable, Reference Voltage=36V, Stock 1=6334, Supplier 1=Digi-Key
VR1: library part P6KE200A-E3/54, "DIODE TVS 171VWM 274VC DO204AC", Breakdown Voltage=190V, Case/Package=DO-15, Clamping Voltage=274V, Forward Voltage=5V, Leakage Current=1uA, Manufacturer="Vishay Semiconductors", Max Breakdown Voltage=210V, Max Operating Temperature=175°C, Max Output Current=2.2A, Max Power Dissipation=600W, Min Operating Temperature=-65°C, Operating Supply Voltage=171V, Package Quantity=4000, Supplier Part Number 1=P6KE200A-E3/54GICT-ND, Test Current=1mA, Category=Diodes, ComponentLink1Description=http://www.vishay.com/docs/88369/p6ke.pdf?src-supplier=Avnet+Europe, ComponentLink1URL=http://www.vishay.com/docs/88369/p6ke.pdf?src-supplier=Avnet+Europe, ComponentLink2Description=http://www.vishay.com/docs/88369/p6ke.pdf?src-supplier=Avnet, ComponentLink2URL=http://www.vishay.com/docs/88369/p6ke.pdf?src-supplier=Avnet, ComponentLink3Description=http://www.vishay.com/docs/88369/p6ke.pdf?src-supplier=Digi-Key, ComponentLink3URL=http://www.vishay.com/docs/88369/p6ke.pdf?src-supplier=Digi-Key, ComponentLink4Description=http://components.arrow.com/part/dataview/42814345S7553311N5680?src-supplier=Arrow, ComponentLink4URL=http://components.arrow.com/part/dataview/42814345S7553311N5680?src-supplier=Arrow, ComponentLink5Description=http://www.farnell.com/datasheets/1911693.pdf?src-supplier=Element14, ComponentLink5URL=http://www.farnell.com/datasheets/1911693.pdf?src-supplier=Element14, ComponentLink6Description=http://www.vishay.com/docs/88369/p6ke.pdf?src-supplier=Future+Electronics, ComponentLink6URL=http://www.vishay.com/docs/88369/p6ke.pdf?src-supplier=Future+Electronics, ComponentLink7Description=https://www.verical.com/server-webapp/html/getDatasheet?partID=84740&src-supplier=Verical, ComponentLink7URL=https://www.verical.com/server-webapp/html/getDatasheet?partID=84740&src-supplier=Verical, Diameter=3.6mm, Direction=Unidirectional, Element Configuration=Single, ESD Protection=Yes, Lead Free="Lead Free", Length=7.6mm, Manufacturer Part Number=P6KE200A-E3/54, Max Reverse Leakage Current=1uA, Max Surge Current=2.2A, Min Breakdown Voltage=190V, Mount="Through Hole", Number of Channels=1, Number of Elements=1, Number of Pins=2, Packaging="Tape and Reel", Peak Pulse Current=2.2A, Peak Pulse Power=600W, Polarity=Unidirectional, Power Dissipation=600W, Radiation Hardening=No, REACH SVHC=Unknown, Reverse Breakdown Voltage=190V, Reverse Standoff Voltage=171V, Stock 1=7709, Supplier 1=Digi-Key, Termination=Axial
X1 X2 X3 X4: library part "Power Terminal"

## Nets (pads, with @x,y where several pads share a name; then routed paths per layer and width w, separated by ;. In a path a pad name is that pad's centre, name@x,y a point inside that pad or via, vN(x,y) a via of type N, cw(c..) or ccw(c..) an arc to the next point about the centre after c; other vN are vias at no path point)
D: D5.1 T1.3 U1.5
NetC1_1: C1.1 D2.1 D4.1 L1.1 R1.1 | length 40.4
  Bottom Layer w1.5: D4.1@16.315,27.786 14.111,27.786 12.3,25.975 12.3,18.55 14.748,16.102 D2.1@16.442,16.102 ; D2.1 17.6,16.1 21.9,20.4 C1.1 23.9,20.4 24.6,19.7 24.6,14.625 L1.1 R1.1
NetC1_2: C1.2 D1.2 D3.2 L2.1 | length 18.9
  Bottom Layer w1.5: D1.2 D3.2 17.2,24.5 22.3,24.5 C1.2 23.2,32.785 L2.1@23.119,32.866
NetC2_2: C2.2 C4.1 L2.2 R3.2 T1.1 VR1.1 | length 61.4
  Bottom Layer w1.5: L2.2@27.119,32.866 29.834,32.866 32.835,29.865 C2.2 42.105,29.865 42.105,31.105 44,33 48.1,33 49.875,31.225 49.875,30.575 ; R3.2 49.875,30.575 ; T1.1 55.164,13.064 57.2,15.1 57.2,31 C4.1 55.7,32.5 51.8,32.5 49.875,30.575
NetC3_2: C3.2 U1.1 | length 5.4
  Bottom Layer w1.2: C3.2 34.729,9.371 U1.1
NetC4_2: C4.2 C6.1 C7.1 R8.1 T1.9 U3.2 X4.1 | length 51.7
  Bottom Layer w0.7: X4.1 92.5,31.7 92.5,20.8 R8.1 92.5,20.4 94,18.9 94,9.4 91.6,7 U3.2
  Bottom Layer w1.5: C4.2 66.1,34.8 66.1,18.5 67.736,16.864 T1.9
NetC5_1: C5.1 R4.2 | length 12.4
  Bottom Layer w0.7: R4.2@72.1,2.4 73.3,1.2 78.3,1.2 81.6,4.5 C5.1
NetC5_2: C5.2 C6.2 D6.2 L3.1 R5.1 | length 11.9
  Bottom Layer w0.7: R5.1 76.6,8.7 81.8,8.7 C5.2 82.6,11.031 D6.2
NetC7_2: C7.2 L3.2 R7.2 X3.1 | length 6.4
  Bottom Layer w0.7: L3.2 83.596,23.404 86.6,20.4 R7.2
NetC8_1: C8.1 R6.1 U2.2 U3.3 | length 28.1
  Bottom Layer w0.7: U2.2@64.6,7.34 U2.2 66.24,7.34 66.8,7.9 R6.1 69.2,7.9 70.9,6.2 84.1,6.2 85.8,4.5 C8.1 87.5,3.7 90,3.7 U3.3
NetC8_2: C8.2 R7.1 R8.2 U3.1 | length 14
  Bottom Layer w0.7: C8.2 87.3,10.1 90.2,10.1 U3.1 92.1,11.4 R8.2 R7.1
NetD1_1: D1.1 D2.2 RF1.2 | length 16.5
  Bottom Layer w1.5: D1.1 D2.2 7.925,14.5 10.225,12.2 13.95,12.2 15.99,10.16 RF1.2
NetD3_1: D3.1 D4.2 X2.1 | length 10.4
  Bottom Layer w1.5: X2.1 6.198,31.977 7.925,30.25 D4.2 D3.1
NetD5_2: D5.2 VR1.2 | length 10.1
  Bottom Layer w1.5: VR1.2@42.105,21.4 42.105,23.205 46.169,27.269 D5.2
NetD6_1: D6.1 R4.1 T1.10 | length 6.5
  Bottom Layer w0.7: T1.10 72.1,9.739 R4.1
NetR2_1: R2.1 U1.4 U2.4 | length 13.3
  Bottom Layer w1: U1.4 46.169,8.331 48,6.5 R2.1 51.1,6.5 52.8,4.8 U2.4@56.98,4.8
NetR2_2: R2.2 R3.1 | length 2.3
  Bottom Layer w1: R2.2 R3.1@49.9,17.225
  Bottom Layer w1.2: R3.1 R3.1@49.9,17.225
NetR5_2: R5.2 R6.2 U2.1 | length 13.4
  Bottom Layer w0.7: U2.1@64.6,4.8 U2.1 65.7,4.8 67.6,2.9 R6.2 69.1,2.9 70.8,4.6 73.3,4.6 75,2.9 R5.2
NetRF1_1: RF1.1 X1.1 | length 6.2
  Bottom Layer w1.5: X1.1 RF1.1
S: C2.1 C3.1 L1.2 R1.2 U1.2 U1.3 U1.7 U1.8 U2.3 | length 29.1
  Bottom Layer w1: 43.8,13 48,13 51,10 53.6,10 56.26,7.34 U2.3@56.98,7.34
  Bottom Layer w1.5: L1.2 L1.2@27.2,13.2 ; R1.2 27.2,8.45 L1.2@27.2,13.2 ; C3.1@33.625,15.525 29.525,15.525 L1.2@27.2,13.2
pads on no net: 1. 2. 3. 4. T1.2 T1.4 T1.5 T1.6 T1.7 T1.8

## Polygon pours and split planes (outlines as drawn)
NetC7_2 on Bottom Layer "NETC7_2_L02_P012" (solid, remove dead copper, pour order 12): 91.5,28.1 91.5,25.5 88,25.5 84.5,22 82.3,22 78.9,25.4 78.9,28.1
NetC4_2 on Bottom Layer "NETC4_2_L02_P010" (solid, remove dead copper, pour order 10): 91.5,35.5 83.3,35.5 76.1,28.3 78.5,28.3 82.8,32.6 91.5,32.6
NetC5_2 on Bottom Layer "NETC5_2_L02_P008" (solid, remove dead copper, pour order 8): 76.4,11.1 76.4,20.2 77,20.8 84.5,20.8 84.5,13.9 81.7,11.1
NetC4_2 on Bottom Layer "NETC4_2_L02_P006" (solid, remove dead copper, pour order 6): 66.904,15.7 75.2,15.7 75.2,22.2 78.5,25.5 78.5,28.6 76.4,28.6 70.8,23 70.8,19.3 70.1,18.6 66.8,18.6
NetD6_1 on Bottom Layer "NETD6_1_L02_P004" (solid, remove dead copper, pour order 4): 66.9,14.3 75.2,14.3 75.2,11.1 66.9,11.1
S on Bottom Layer "S_L02_P000" (solid, remove dead copper, pour order 0): 32.35,26.7 39.2,26.7 39.2,20.5 41.8,17.9 41.8,16 44.3,13.5 44.3,8.4 40.4,8.4 40.4,8.5 40.4,11.3 37.5,14.2 33,14.2 32.35,14.85
D on Bottom Layer "D_L02_P002" (solid, remove dead copper, pour order 2): 44.7,15.6 44.7,22.2 54.9,22.2 54.9,19.3 47.6,19.3 47.6,15.6

## Silkscreen, mask and mechanical layers (free items; w line width, h text height)
Board Outline:
  pour cut-out: 60.4,3 ccw(c61,3) 61.6,3 61.6,9.5 ccw(c61,9.5) 60.4,9.5
  lines w0.1: 0,0 0,0.9 0,38.4 96.5,38.4 96.5,0.9 96.5,0 0,0 ; 60.4,3 ccw(c61,3) 61.6,3 61.6,9.5 ccw(c61,9.5) 60.4,9.5 60.4,3